# EAGLE board Evan_bot (EAGLE 9.6.0)
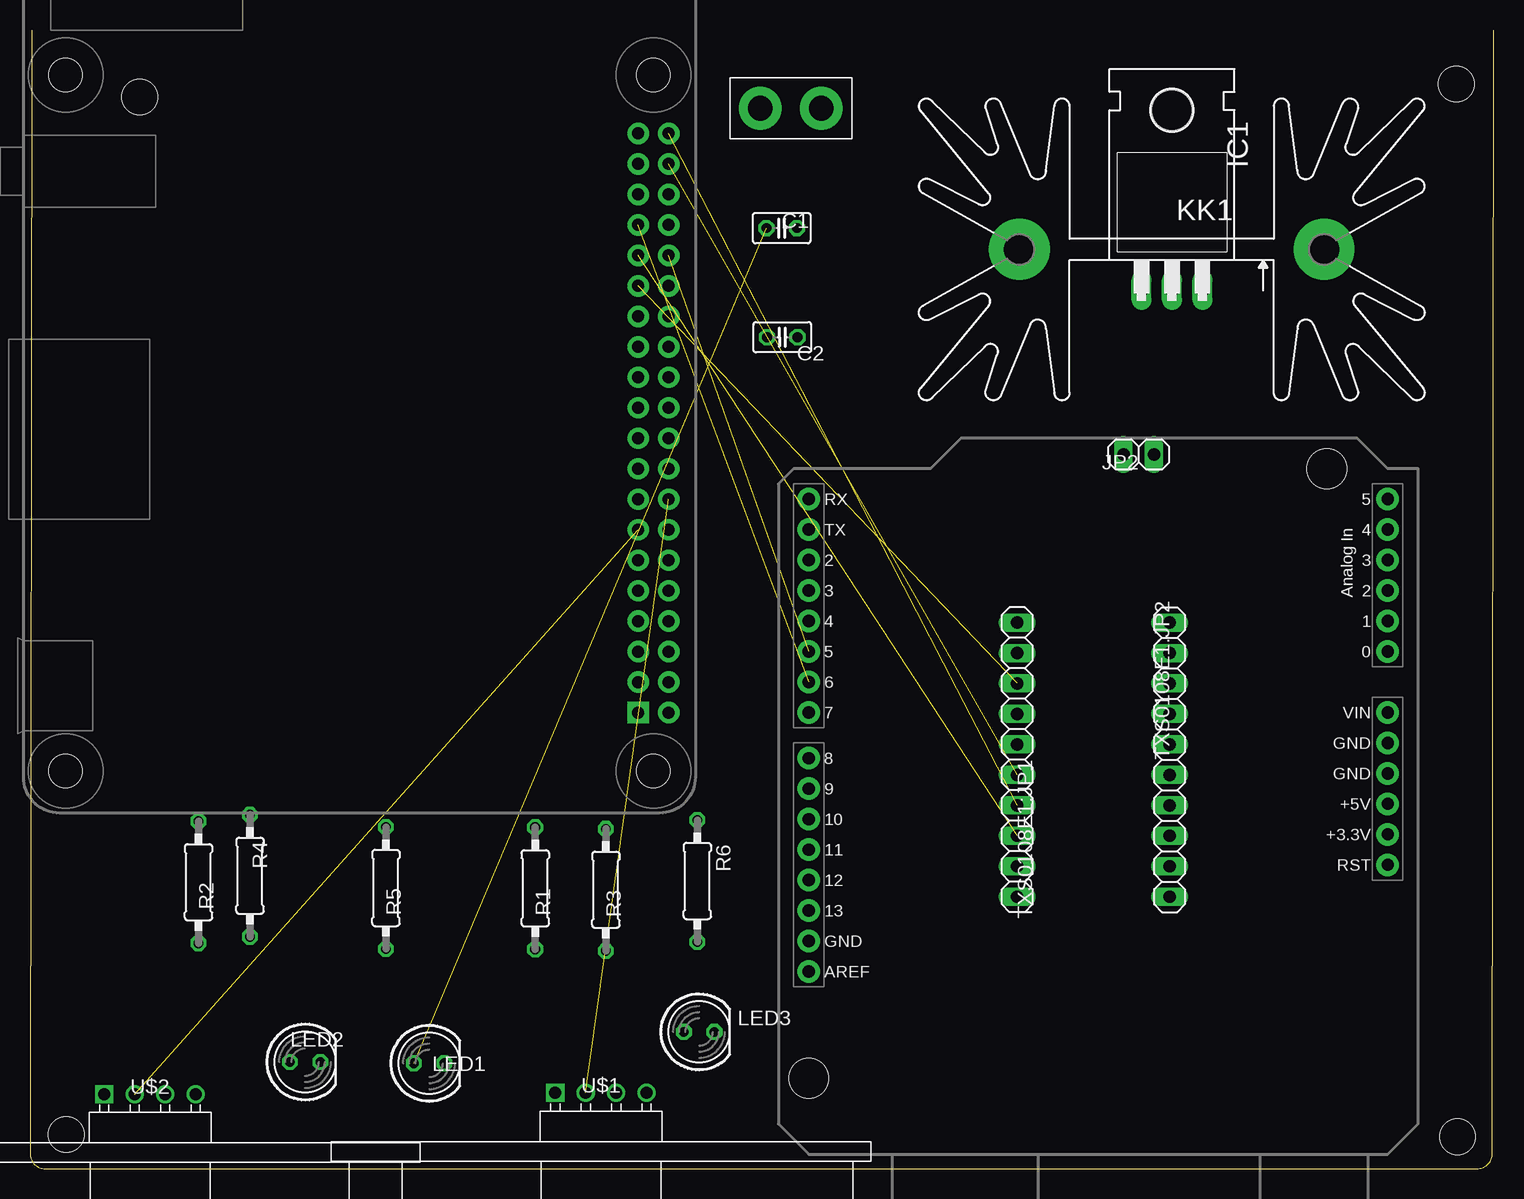
[diagram p0: board, top side]
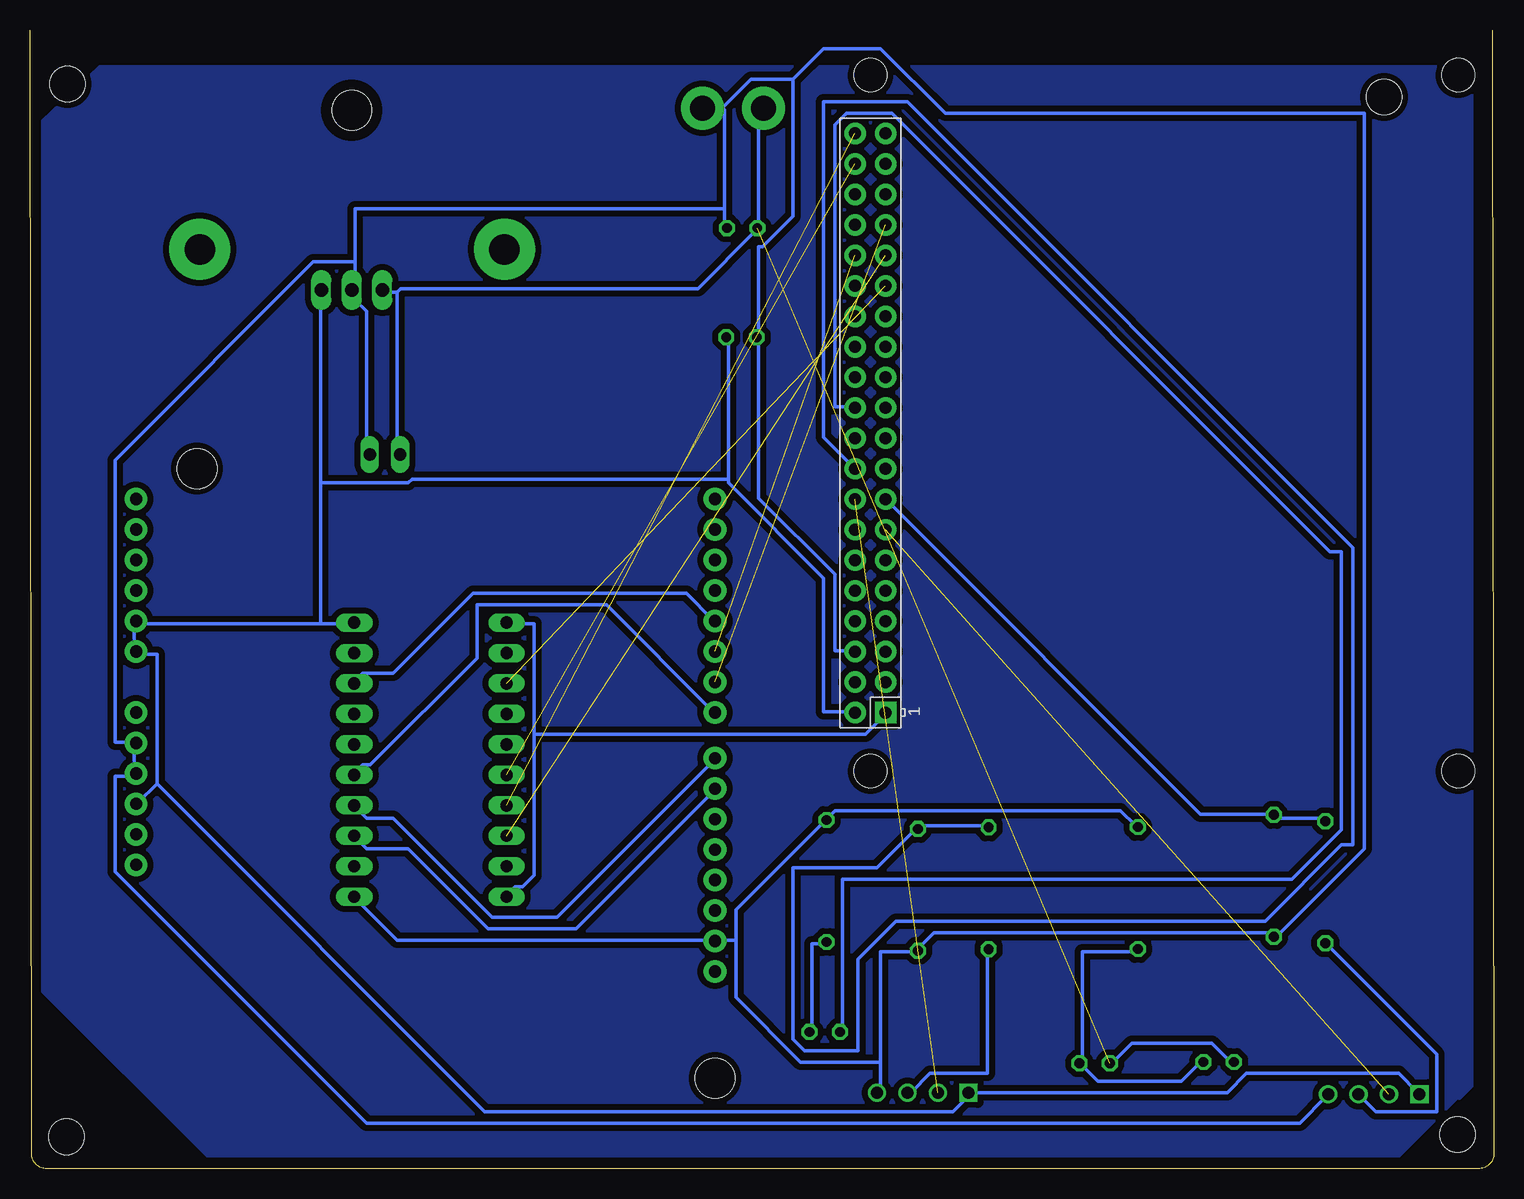
[diagram p1: board, bottom side, seen from below]

Size 122.03 x 94.89 mm. Coordinates in mm from the lower left corner, seen from the top.
Outline: 122.03,94.89 121.9,1.27 arc-90 120.63,0 1.27,0 arc-90 0,1.27 0.13,94.89
Copper layers (1*16): Top 0.035mm / dielectric 1.5mm / Bottom 0.035mm
Design rules "542 *": minimum track width 12mil, minimum drill 0.5mm, track to track 0.5mm, track to pad 0.5mm, pad to pad 0.5mm, via to via 0.5mm, smd to smd 0mil, copper to edge 0.5mm, drill to drill 0.5mm, minimum pad ring 10mil, minimum via ring 8mil, stop-mask expansion 4mil, vias tented up to drill 0mil, thermal gap 10mil
Holes 2.95 mm at 3.02,2.84 9.14,89.31 118.9,90.4 119,2.67

## Footprints (pad centres in the part's own frame; a part is rotated, then mirrored left to right if it is on the bottom)
C025-025X050 = drill 0.813 octagon: 1 -1.27,0; 2 1.27,0
TO220H = drill 1.118 long: 1 -2.54,-10.16; 2 0,-10.16; 3 2.54,-10.16 | hole 3.302: 0,4.826
1X02 = drill 1.016 long: 1 -1.27,0; 2 1.27,0
1X02_XTRA_BIG = drill 2.057 pad 3.556: 1 -2.54,0; 2 2.54,0
SK129 = drill 2.54 pad 5.08: A2,5 -12.7,-0.889; B2,5 12.7,-0.889
LED5MM = drill 0.813 octagon: A -1.27,0; K 1.27,0
RASPI_BOARD_B+_FULL = drill 1 pad 1.778 square: 1 8.37,51.23 | drill 1 pad 1.778: 2 8.37,53.77; 3 10.91,51.23; 4 10.91,53.77; 5 13.45,51.23; 6 13.45,53.77; 7 15.99,51.23; 8 15.99,53.77; 9 18.53,51.23; 10 18.53,53.77; 11 21.07,51.23; 12 21.07,53.77; 13 23.61,51.23; 14 23.61,53.77; 15 26.15,51.23; 16 26.15,53.77; 17 28.69,51.23; 18 28.69,53.77; 19 31.23,51.23; 20 31.23,53.77; 21 33.77,51.23; 22 33.77,53.77; 23 36.31,51.23; 24 36.31,53.77; 25 38.85,51.23; 26 38.85,53.77; 27 41.39,51.23; 28 41.39,53.77; 29 43.93,51.23; 30 43.93,53.77; 31 46.47,51.23; 32 46.47,53.77; 33 49.01,51.23; 34 49.01,53.77; 35 51.55,51.23; 36 51.55,53.77; 37 54.09,51.23; 38 54.09,53.77; 39 56.63,51.23; 40 56.63,53.77 | hole 2.75: 3.5,3.5; 3.5,52.5; 61.5,3.5; 61.5,52.5
0207/10 = drill 0.813 octagon: 1 -5.08,0; 2 5.08,0
1X10 = drill 1.016 long: 1 -11.43,0; 2 -8.89,0; 3 -6.35,0; 4 -3.81,0; 5 -1.27,0; 6 1.27,0; 7 3.81,0; 8 6.35,0; 9 8.89,0; 10 11.43,0
DUEMILANOVE_SHIELD = drill 1.016 pad 1.88: 3.3V 50.8,26.67; 5V 50.8,29.21; A0 50.8,41.91; A1 50.8,44.45; A2 50.8,46.99; A3 50.8,49.53; A4 50.8,52.07; A5 50.8,54.61; AREF 2.54,15.24; D2 2.54,49.53; D3 2.54,46.99; D4 2.54,44.45; D5 2.54,41.91; D6 2.54,39.37; D7 2.54,36.83; D8 2.54,33.02; D9 2.54,30.48; D10 2.54,27.94; D11 2.54,25.4; D12 2.54,22.86; D13 2.54,20.32; GND@0 50.8,31.75; GND@1 50.8,34.29; GND@2 2.54,17.78; RES 50.8,24.13; RX 2.54,54.61; TX 2.54,52.07; VIN 50.8,36.83 | hole 3.302: 45.72,57.15; 2.54,6.35
ULTRASONIC-HC-SR04#V = drill 1 square: 1 -3.81,0 | drill 1: 2 -1.27,0; 3 1.27,0; 4 3.81,0

## Placement (x,y rotation side)
C1  330n  [C025-025X050]  62.66,78.38 0 top
C2  100n  [C025-025X050]  62.71,69.29 180 top
IC1  7805T  [TO220H]  95.2,83.39 0 top
JP2  [1X02]  92.43,59.52 180 top
JP7  SHIELD_PWR  [1X02_XTRA_BIG]  63.42,88.37 0 top
KK1  SK129-PAD  [SK129]  95.17,75.72 180 top
LED1  [LED5MM]  33.27,8.79 0 top
LED2  [LED5MM]  22.94,8.89 0 top
LED3  [LED5MM]  55.78,11.4 0 top
PI  RASPI_BOARD_B+_F  [RASPI_BOARD_B+_FULL]  -0.53,29.64 90 bottom
R1  1k  [0207/10]  42.11,23.37 270 top
R2  1k  [0207/10]  14.05,23.88 270 top
R3  2k  [0207/10]  48.01,23.24 270 top
R4  2k  [0207/10]  18.34,24.41 270 top
R5  10  [0207/10]  29.67,23.39 270 top
R6  100  [0207/10]  55.63,23.98 270 top
TXS0108E1:JP1  [1X10]  82.3,34.09 270 top
TXS0108E1:JP2  [1X10]  95,34.09 90 top
U3  ARDUINO_SHIELDLABEL  [DUEMILANOVE_SHIELD]  62.38,1.19 0 top
U$1  ULTRASONIC-HC-SR04#V  [ULTRASONIC-HC-SR04#V]  47.6,6.32 0 top
U$2  ULTRASONIC-HC-SR04#V  [ULTRASONIC-HC-SR04#V]  10.01,6.22 0 top

## Library data of the parts
C1 C2 = rcl; SPICEPREFIX: C
IC1 = linear
JP2 TXS0108E1:JP1 TXS0108E1:JP2 = pinhead
JP7 U3 = SparkFun
KK1 = heatsink
LED1-LED3 = led
PI = raspberrypi_bastelstube_v13
R1-R6 = resistor
U$1 U$2 = diy-modules

## Nets
0: C1.2 C2.2 IC1.2 JP2.1 JP7.2 PI.6 R3.2 R4.2 R5.1 R6.1 TXS0108E1:JP2.1 U3.GND@0 U3.GND@1 U3.GND@2 U$1.4 U$2.4
L_BCK: PI.40 TXS0108E1:JP1.7
L_FWD: PI.38 TXS0108E1:JP1.6
L_SPD: PI.32 U3.D5
L_US_ECHO: PI.18 R1.1 R3.1
L_US_TRIG: PI.16 U$1.2
N$1: R1.2 U$1.3
N$2: R2.2 U$2.3
N$4: LED3.A PI.22
N$5: LED1.K LED2.K R5.2
N$6: LED3.K R6.2
N$13: TXS0108E1:JP2.8 U3.D4
N$14: TXS0108E1:JP2.5 U3.D7
N$15: TXS0108E1:JP2.4 U3.D8
N$16: TXS0108E1:JP2.3 U3.D9
PI_3V3: PI.1 TXS0108E1:JP1.1 TXS0108E1:JP1.10
PI_5V: C2.1 IC1.3 PI.2 TXS0108E1:JP2.10 U3.5V U3.A0 U3.A1 U$1.1 U$2.1
PWR+: C1.1 IC1.1 JP2.2 JP7.1 LED1.A LED2.A
R_BCK: PI.31 TXS0108E1:JP1.8
R_FWD: PI.29 TXS0108E1:JP1.3
R_SPD: PI.33 U3.D6
R_US_ECHO: PI.15 R2.1 R4.1
R_US_TRIG: PI.13 U$2.2
TXS0108E1:A1: TXS0108E1:JP1.2
TXS0108E1:A3: TXS0108E1:JP1.4
TXS0108E1:A4: TXS0108E1:JP1.5
TXS0108E1:A8: TXS0108E1:JP1.9
TXS0108E1:B1: TXS0108E1:JP2.9
TXS0108E1:B3: TXS0108E1:JP2.7
TXS0108E1:B4: TXS0108E1:JP2.6
TXS0108E1:B8: TXS0108E1:JP2.2

## Tracks (layer width: path | path; a pad name or v marks a point on that pad's centre or on a via)
0
  Bottom 0.305: 51.12,8.89 51.12,18.1 48.26,18.1 R3.2 47.94,18.41 46.67,19.68 18.73,19.68 18.41,19.37 R4.2 18.1,19.37 10.79,26.67 10.79,87.95 45.72,87.95 51.12,93.34 55.88,93.34 58.42,90.81 | 51.12,8.89 51.12,6.35 U$1.4 | R5.1 29.84,28.57 31.11,29.84 54.93,29.84 55.56,29.21 R6.1 55.88,28.89 63.18,21.59 63.18,19.05 | TXS0108E1:JP2.1 94.93,22.54 91.44,19.05 65.09,19.05 U3.GND@2 64.77,19.05 63.18,19.05 | 51.12,8.89 57.78,8.89 63.18,14.29 63.18,19.05 | PI.6 53.34,43.18 54.93,43.18 54.93,49.53 61.28,55.88 61.28,69.22 C2.2 61.28,69.53 61.28,76.83 60.96,76.83 58.42,79.38 58.42,90.81 | JP2.1 93.98,59.69 93.98,71.44 94.93,72.39 94.93,73.03 IC1.2 94.93,73.34 94.93,75.56 | 64.14,80.01 64.14,88.27 64.45,88.27 | 64.14,80.01 64.14,78.42 C1.2 | 64.45,88.27 65.72,88.27 JP7.2 64.45,88.27 | 94.93,75.56 94.93,80.01 64.14,80.01 | 58.42,90.81 61.91,90.81 64.45,88.27 | U$2.4 13.97,6.03 16.19,3.81 93.98,3.81 114.94,24.77 114.94,32.7 113.35,32.7 U3.GND@0 113.35,33.02 113.35,35.24 U3.GND@1 113.35,35.56 114.94,35.56 114.94,59.05 98.42,75.56 94.93,75.56
L_BCK  (1 unrouted)
L_FWD  (1 unrouted)
L_SPD  (1 unrouted)
L_US_ECHO
  Bottom 0.305: R1.1 42.23,28.57 47.94,28.57 R3.1 48.26,28.26 51.44,25.08 58.42,25.08 58.42,10.79 57.47,9.84 53.02,9.84 53.02,17.46 49.85,20.64 19.05,20.64 12.7,26.99 11.75,26.99 11.75,51.75 48.9,88.9 55.88,88.9 55.88,60.96 53.34,58.42 PI.18
L_US_TRIG  (1 unrouted)
N$1
  Bottom 0.305: R1.2 42.23,18.1 42.23,7.94 46.99,7.94 48.58,6.35 U$1.3
N$2
  Bottom 0.305: R2.2 13.97,18.73 4.76,9.53 4.76,4.76 9.84,4.76 11.11,6.03 U$2.3
N$3
  pour Bottom: 2.9,5.82 1.83,6.88 1.83,91.24 2.44,91.85 116.2,91.85 120.95,87.33 120.95,14.76 107.26,1.07 7.87,1.07 3,5.94
N$4
  Bottom 0.305: LED3.A 54.29,11.43 54.29,24.13 16.83,24.13 12.7,28.26 12.7,51.44 13.65,51.44 50.16,87.95 53.98,87.95 54.93,87 54.93,63.5 53.34,63.5 PI.22
N$5
  Bottom 0.305: R5.2 29.84,18.1 34.29,18.1 34.29,8.89 LED1.K 34.29,8.57 33.02,7.3 26.04,7.3 24.45,8.89 LED2.K
N$6
  Bottom 0.305: LED3.K 56.83,11.43 56.83,18.73 55.88,18.73 R6.2
N$13
  Bottom 0.305: TXS0108E1:JP2.8 94.93,40.64 94.3,41.27 91.76,41.27 85.09,47.94 67.31,47.94 65.09,45.72 U3.D4
N$14
  Bottom 0.305: TXS0108E1:JP2.5 94.93,33.02 94.3,33.66 93.66,33.66 84.77,42.55 84.77,46.99 73.98,46.99 65.09,38.1 U3.D7
N$15
  Bottom 0.305: TXS0108E1:JP2.4 94.93,30.16 93.98,29.21 91.76,29.21 83.5,20.95 78.11,20.95 65.09,33.97 U3.D8
N$16
  Bottom 0.305: TXS0108E1:JP2.3 94.93,27.62 93.98,26.67 90.49,26.67 83.82,20 76.52,20 65.09,31.43 U3.D9
PI_3V3
  Bottom 0.305: 80.01,36.2 80.01,45.4 82.23,45.4 TXS0108E1:JP1.1 | 80.01,36.2 80.01,24.45 80.96,23.5 81.6,23.5 82.23,22.86 TXS0108E1:JP1.10 | 80.01,36.2 52.39,36.2 50.8,37.78 PI.1
PI_5V
  Bottom 0.305: 63.82,57.47 63.82,57.15 55.88,49.21 55.88,38.1 53.34,38.1 PI.2 | 63.82,57.47 63.82,69.22 C2.1 | U$2.1 6.35,6.35 7.94,7.94 20.64,7.94 22.23,6.35 43.5,6.35 U$1.1 43.81,6.03 45.09,4.76 84.14,4.76 111.44,32.07 | 111.44,32.07 113.03,30.48 U3.5V | 111.44,32.07 111.44,42.86 113.03,42.86 U3.A0 113.35,43.18 113.35,45.4 U3.A1 113.03,45.4 97.79,45.4 | 97.79,45.4 95.25,45.4 TXS0108E1:JP2.10 | 97.79,45.4 97.79,57.15 | 97.79,57.15 97.79,73.03 IC1.3 | 63.82,57.47 90.17,57.47 90.49,57.15 97.79,57.15
PWR+  (1 unrouted)
  Bottom 0.305: 91.44,73.03 91.44,59.69 JP2.2 | 91.44,73.03 92.39,73.03 IC1.1 | JP7.1 60.96,88.27 61.28,88.27 61.28,78.42 C1.1 61.59,78.11 66.36,73.34 91.12,73.34 91.44,73.03 | LED1.A 31.75,8.89 30.16,10.48 23.5,10.48 21.91,8.89 LED2.A
R_BCK  (1 unrouted)
R_FWD  (1 unrouted)
R_SPD  (1 unrouted)
R_US_ECHO
  Bottom 0.305: R2.1 14.29,29.21 18.1,29.21 R4.1 18.41,29.53 24.45,29.53 50.48,55.56 PI.15
R_US_TRIG  (1 unrouted)